# EAGLE board attiny85 (EAGLE 6.5.0)
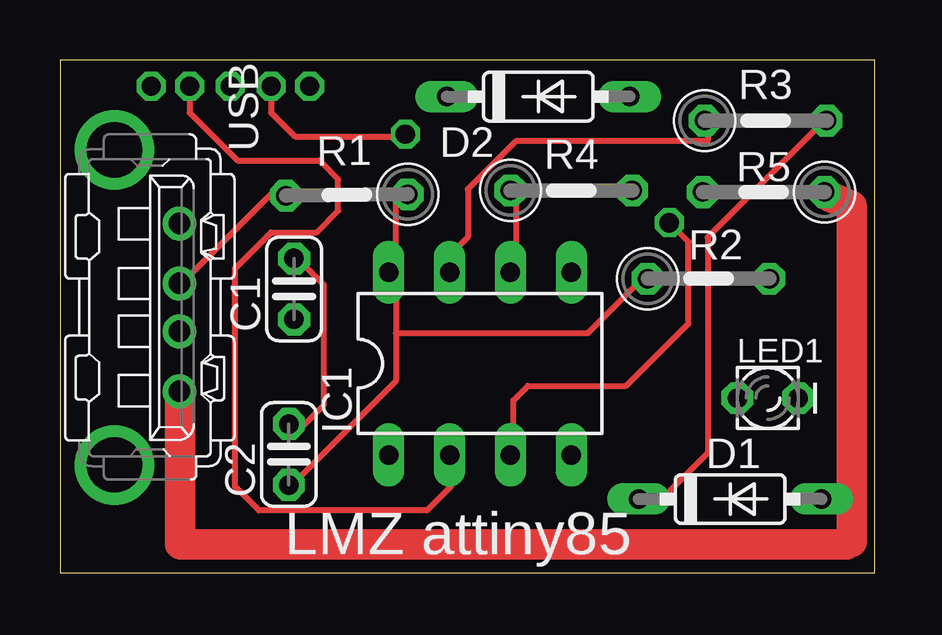
[diagram p0: board, top side]
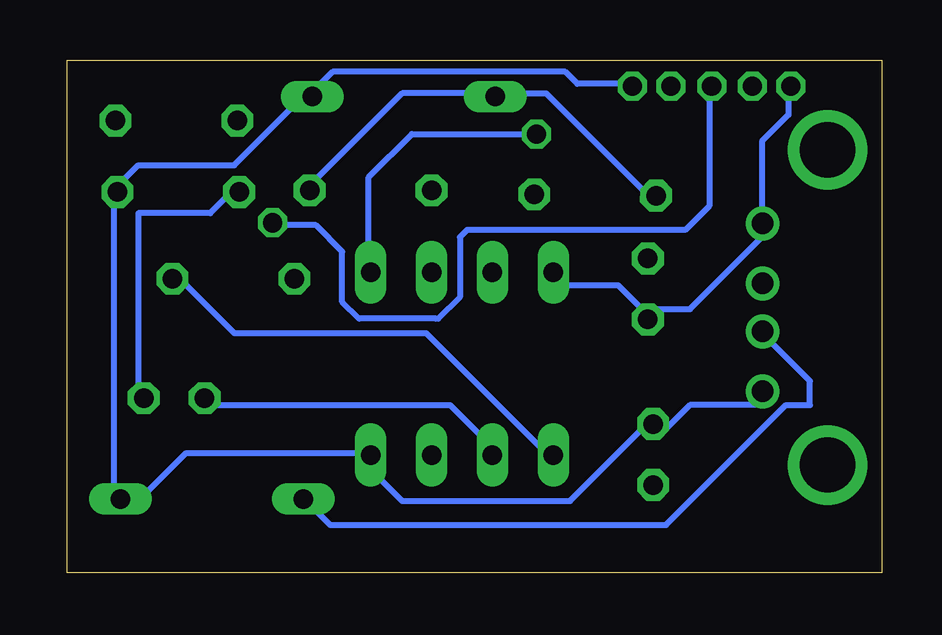
[diagram p1: board, bottom side, seen from below]

Size 33.96 x 21.39 mm. Coordinates in mm from the lower left corner, seen from the top.
Outline: 0,0 33.96,0 33.96,21.39 0,21.39 0,0
Copper layers (1*16): Top 0.035mm / dielectric 1.5mm / Bottom 0.035mm
Design rules "default": minimum track width 10mil, minimum drill 24mil, track to track 8mil, track to pad 8mil, pad to pad 8mil, via to via 8mil, smd to smd 8mil, copper to edge 40mil, drill to drill 8mil, minimum pad ring 10mil, minimum via ring 8mil, stop-mask expansion 4mil, vias tented up to drill 0mil, thermal gap 10mil

## Footprints (pad centres in the part's own frame; a part is rotated, then mirrored left to right if it is on the bottom)
C025-024X044 = drill 0.813 octagon: 1 -1.27,0; 2 1.27,0
DIODE_DO35-7 = drill 0.813 long: A 3.81,0; C -3.81,0
DIL08 = drill 0.813 long: 1 -3.81,-3.81; 2 -1.27,-3.81; 3 1.27,-3.81; 4 3.81,-3.81; 5 3.81,3.81; 6 1.27,3.81; 7 -1.27,3.81; 8 -3.81,3.81
LED_LD260 = drill 0.813 octagon: A -1.27,0; K 1.27,0
0207/5V = drill 0.813 octagon: 1 -2.54,0; 2 2.54,0
KUSBVX = drill 0.9 pad 1.3: 1 3.5,0; 2 1,0; 3 -1,0; 4 -3.5,0 | drill 2.3 pad 2.8: M1 -6.57,2.71; M2 6.57,2.71

## Placement (x,y rotation side)
C1  [C025-024X044]  9.76,11.84 90 top
C2  [C025-024X044]  9.54,4.94 90 top
D1  [DIODE_DO35-7]  27.94,3.08 0 top
D2  [DIODE_DO35-7]  19.94,19.86 0 top
IC1  [DIL08]  17.51,8.73 0 top
LED1  [LED_LD260]  29.51,7.29 0 top
R1  [0207/5V]  11.96,15.76 180.6 top
R2  [0207/5V]  27.04,12.27 0 top
R3  [0207/5V]  29.42,18.86 0 top
R4  [0207/5V]  21.32,15.95 0 top
R5  [0207/5V]  29.34,15.88 180 top
USB  KUSBVX  [KUSBVX]  4.98,11.07 90 top

## Library data of the parts
C1 C2 = rcl
D1 D2 LED1 = eagle-ltspice; SPICEMODEL: NONE; SPICEPREFIX: D; SPICETYPE: diode
IC1 = ic-package
R1-R5 = resistor
USB = con-kycon

## Nets
GND: C1.2 C2.2 D1.A D2.A IC1.4 R5.1 USB.4
N$1: IC1.7 R3.1
N$2: IC1.1 R2.2
N$3: D1.C R3.2 USB.3
N$4: D2.C R1.2 R4.2 USB.2
N$5: LED1.K R5.2
N$6: IC1.6 R4.1
N$7: IC1.2 LED1.A
N$11: IC1.3
N$12: IC1.5
VCC: C1.1 C2.1 IC1.8 R1.1 R2.1 USB.1

## Tracks (layer width: path | path; a pad name or v marks a point on that pad's centre or on a via)
GND
  Top 0.254: C1.2 10,13 11,12 11,7 10,6 C2.2
  Bottom 0.254: 32,16 31,17 27,17 24,20 D2.A | USB.4 5,7 8,7 9,6 C2.2 10,6 13,3 20,3 21,4 IC1.4 21,5 29,5 31,3 D1.A 32,3 32,16 | 32,16 R5.1
N$1
  Top 0.254: IC1.7 16,13 17,14 17,16 19,18 27,18 27,19 R3.1
N$2
  Bottom 0.254: IC1.1 14,5 19,10 27,10 29,12 R2.2
N$3
  Top 0.254: D1.C 25,3 27,5 27,14 32,19 R3.2
  Bottom 0.254: USB.3 5,10 3,8 3,7 4,7 9,2 23,2 24,3 D1.C
N$4
  Top 0.254: R1.2 9,16 5,12 USB.2
  Bottom 0.254: R4.2 24,16 20,20 17,20 D2.C 16,20 14,20 10,16 R1.2
N$5
  Bottom 0.254: LED1.K 31,7 31,15 28,15 27,16 R5.2
N$6
  Top 0.254: IC1.6 19,13 19,16 R4.1
N$7
  Bottom 0.254: IC1.2 16,5 18,7 28,7 LED1.A
N$8
  Top 1.27: 32.1,15.7 33,15.3 33,1.3
N$9
  Top 1.27: 5,7.6 5,1.2
N$10
  Top 1.27: 5,1.2 32.8,1.2
N$24
  Top 0.305: 32.6,5.1 32.7,5
S$1  (via drill 0.8)
  Top 0.254: v5.4,20.3 5.4,19.2 7.4,17.2 10.8,17.2
S$2  (via drill 0.8)
  other vias: 7.1,20.3
S$3  (via drill 0.8)
  other vias: 8.8,20.3
S$4  (via drill 0.8)
  other vias: 10.4,20.3
S$5  (via drill 0.8)
  other vias: 3.8,20.3
S$6
  Bottom 0.254: 3.9,19.8 3.9,19.1 5,18 5,14.5
S$7  (via drill 0.8)
  Bottom 0.254: 21.4,13.5 21.4,16.5 19.6,18.3 v14.4,18.3 14.3,18.2
S$9
  Top 0.254: 16.3,4 16.3,3.6 15.3,2.6 8.3,2.6 7.3,3.6 7.3,12.7 8.8,14.2 10.7,14.2 11.6,15.1 11.6,16.4 10.9,17.1
S$10
  Top 0.254: 8.8,19.8 8.8,19.2 9.8,18.2 14.5,18.2
S$11
  Bottom 0.254: 7.2,19.7 7.2,15.3 8.2,14.3 17.3,14.3 17.6,14 17.6,11.5 18.5,10.6
S$12  (via drill 0.8)
  Top 0.254: 18.9,5.8 18.9,7.2 19.5,7.8 23.6,7.8 26.2,10.4 26.2,13.8 v25.4,14.6
  Bottom 0.254: 18.6,10.6 21.8,10.6 22.5,11.3 22.5,13.4 23.6,14.5 25.3,14.5 v25.4,14.6
S$13
  Bottom 0.254: 10.9,20.4 12.7,20.4 13.2,20.9 22.9,20.9 23.8,20
VCC
  Top 0.254: 14,10 14,12 IC1.8 14,13 14,16 R1.1 | 14,10 14,8 10,4 C2.1 | 14,10 22,10 24,12 R2.1
  Bottom 0.254: 10,11 11,12 14,12 IC1.8 | 10,11 8,11 5,14 USB.1 | 10,11 C1.1

## Text on the board
tNames: LMZ attiny85